# EAGLE board OpenMV-Shield-DESKTOP-4DKEQLF (EAGLE 9.1.1)
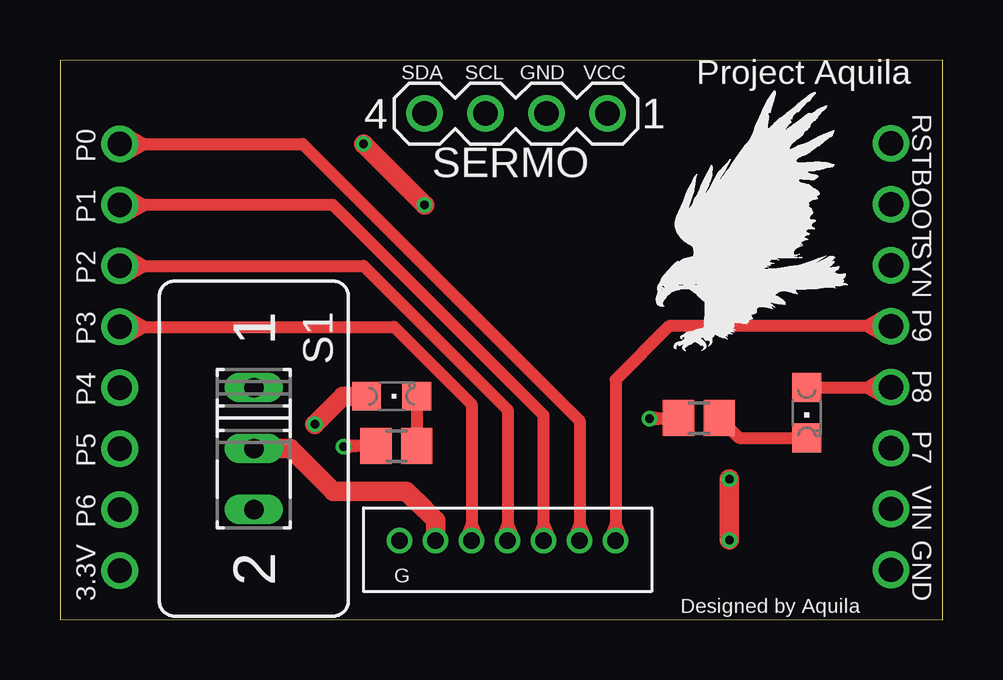
[diagram p0: board, top side]
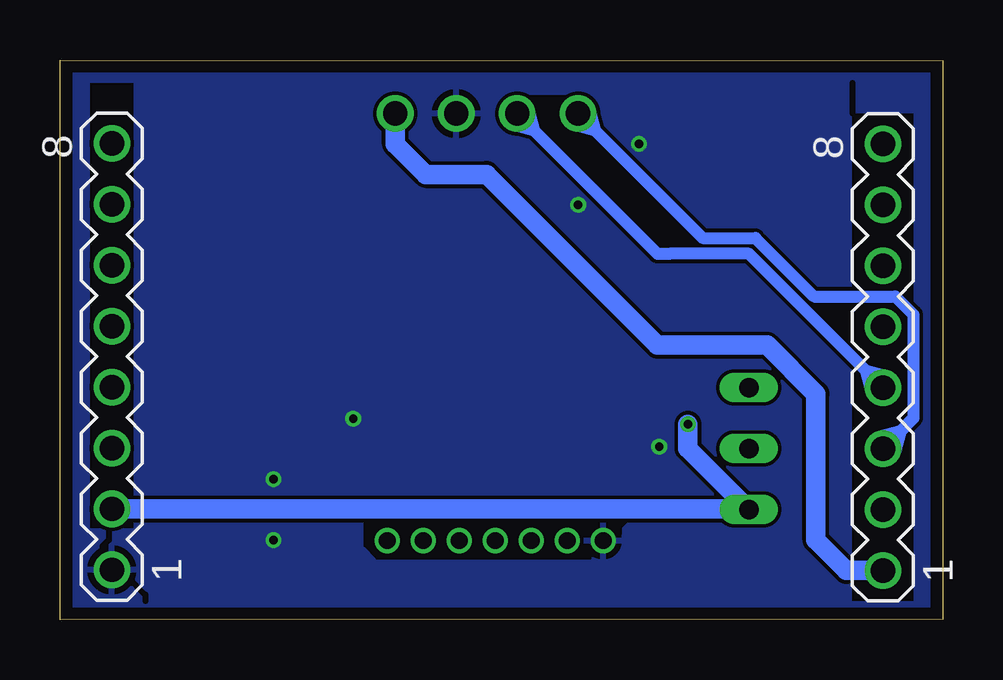
[diagram p1: board, bottom side, seen from below]

Size 36.78 x 23.34 mm. Coordinates in mm from the lower left corner, seen from the top.
Outline: 0,0.03 36.78,0 36.78,23.34 0,23.32 0,0.03
Copper layers (1*16): Top 0.035mm / dielectric 1.6mm / Bottom 0.035mm
Design rules "Elecrow_2-layer_PCB_eagle_rule": minimum track width 6mil, minimum drill 12mil, track to track 6mil, track to pad 6mil, pad to pad 6mil, via to via 8mil, smd to smd 0mil, copper to edge 20mil, drill to drill 10mil, minimum pad ring 6mil, minimum via ring 6mil, stop-mask expansion 0mil, vias tented up to drill 100mil, thermal gap 10mil
bRestrict: area 33.7,3.8 to 35.5,22.4; area 1.2,0.8 to 3.8,21.1; 11 lines

## Footprints (pad centres in the part's own frame; a part is rotated, then mirrored left to right if it is on the bottom)
CHIPLED_0805 = smd 1.2 x 1.2: A 0,-1.05; C 0,1.05
R0805 = smd 1.3 x 1.5: 1 -0.85,0; 2 0.85,0
B7B-ZR = drill 0.7: 1 10.5,-1.3; 2 9,-1.3; 3 7.5,-1.3; 4 6,-1.3; 5 4.5,-1.3; 6 3,-1.3; 7 1.5,-1.3
M251 = drill 0.813 long: 1 -2.54,0; 2 0,0; 3 2.54,0
MA04-1 = drill 1.016: 1 -3.81,0; 2 -1.27,0; 3 1.27,0; 4 3.81,0
MA08-1 = drill 1.016: 1 -8.89,0; 2 -6.35,0; 3 -3.81,0; 4 -1.27,0; 5 1.27,0; 6 3.81,0; 7 6.35,0; 8 8.89,0

## Placement (x,y rotation side)
L1  SP-L  [CHIPLED_0805]  13.82,9.32 270 top
L2  LED  [CHIPLED_0805]  31.12,8.64 180 top
LED-R  330  [R0805]  26.62,8.41 0 top
MV1  B7B-ZR  [B7B-ZR]  12.65,4.6 0 top
S1  [M251]  8.08,7.14 270 top
SERMO  [MA04-1]  19,21.11 180 top
SP-R  330  [R0805]  14.02,7.24 0 top
SV1  [MA08-1]  34.62,10.97 90 bottom
SV2  [MA08-1]  2.49,10.95 90 bottom
U$1  [EAGLE-PLC-8MM]  24.84,11.2 0 top

## Library data of the parts
L1 L2 = led
LED-R SP-R = 0@Mylibrary-main1
MV1 = jst
S1 = switch
SERMO SV1 SV2 = 0con-lstb; OC_FARNELL: unknown; OC_NEWARK: unknown
U$1 = logo

## Nets
+3V3: SERMO.1 SV2.1
+5V: L1.A S1.3 SV1.2
BOOT: SV1.7
GND: LED-R.1 MV1.7 SERMO.2 SP-R.1 SV1.1
MISOD: MV1.3 SV2.7
MOSID: MV1.2 SV2.8
MV: MV1.1 SV1.5
MVS: MV1.5 SV2.5
N$1: MV1.6 S1.2
N$2: L2.C LED-R.2
N$43: L1.C SP-R.2
P4: SERMO.3 SV2.4
P5: SERMO.4 SV2.3
P6: SV2.2
P7: SV1.3
P8: L2.A SV1.4
RST: SV1.8
SCKD: MV1.4 SV2.6
SYN: SV1.6

## Tracks (layer width: path | path; a pad name or v marks a point on that pad's centre or on a via)
+3V3
  Bottom 0.813: SERMO.1 22.81,19.84 21.54,18.57 19,18.57 11.89,11.46 7.32,11.46 5.28,9.42 5.28,3.33 4.01,2.06 SV2.1
+5V  (via drill 0.35)
  Top 0.813: L1.A 11.79,9.32 v10.62,8.15
  Bottom 0.813: 8.1,4.62 S1.3 | SV1.2 8.1,4.62 | v10.62,8.15 10.62,7.14 8.1,4.62
GND  (via drill 0.35)
  Top 0.508: LED-R.1 arc-90 25.74,8.38 25.09,8.38 | 25.09,8.38 v24.56,8.38 | SP-R.1 12.34,7.24 | 12.34,7.24 12.09,7.24 v11.81,7.21 | 25.09,8.38 24.57,8.45 v24.56,8.38 | 25.09,8.38 24.57,8.31 v24.56,8.38 | 12.34,7.24 11.82,7.29 v11.81,7.21 | 12.34,7.24 11.83,7.14 v11.81,7.21
  Top 0.813: v27.89,3.33 v27.89,5.87 | v12.65,19.84 v15.19,17.3
  pour Bottom: -0.05,24.92 36.78,24.92 36.78,-0.48 -0.05,-0.48
MISOD
  Top 0.508: MV1.3 20.15,4 | 20.15,4 20.15,8.53 11.38,17.3 3.51,17.3 | 3.51,17.3 SV2.7 | 20.15,4 19.9,3.4 MV1.3 | 20.15,4 20.4,3.4 MV1.3 | 3.51,17.3 2.74,17.74 SV2.7 | 3.51,17.3 2.74,16.86 SV2.7
MOSID
  Top 0.508: SV2.8 3.51,19.84 | 3.51,19.84 10.11,19.84 21.65,8.3 21.65,4 | 21.65,4 MV1.2 | 21.65,4 21.4,3.4 MV1.2 | 21.65,4 21.9,3.4 MV1.2 | 3.51,19.84 2.74,20.28 SV2.8 | 3.51,19.84 2.74,19.4 SV2.8
MV
  Top 0.508: 23.15,4 23.15,10.02 25.37,12.24 33.6,12.24 | 23.15,4 MV1.1 | SV1.5 33.6,12.24 | 23.15,4 22.9,3.4 MV1.1 | 23.15,4 23.4,3.4 MV1.1 | 33.6,12.24 34.37,11.8 SV1.5 | 33.6,12.24 34.37,12.68 SV1.5
MVS
  Top 0.508: SV2.5 3.51,12.22 | 3.51,12.22 13.92,12.22 17.15,8.99 17.15,4 | 17.15,4 MV1.5 | 3.51,12.22 2.74,12.66 SV2.5 | 3.51,12.22 2.74,11.78 SV2.5 | 17.15,4 16.9,3.4 MV1.5 | 17.15,4 17.4,3.4 MV1.5
N$1
  Top 0.813: MV1.6 15.65,4.14 15.19,4.6 14.43,5.36 11.38,5.36 9.6,7.14 S1.2
N$2
  Top 0.508: LED-R.2 28.29,7.59 L2.C
N$43
  Top 0.508: L1.C SP-R.2
P4
  Bottom 0.508: SERMO.3 17.01,20.39 | 17.01,20.39 11.89,15.27 11.38,15.27 8.08,15.27 3.21,10.4 | SV2.4 3.21,10.4 | 3.21,10.4 2.36,10.17 SV2.4 | 3.21,10.4 2.98,9.55 SV2.4 | 17.01,20.39 17.86,20.62 SERMO.3 | 17.01,20.39 17.24,21.24 SERMO.3
P5
  Bottom 0.508: SERMO.4 14.47,20.39 | 14.47,20.39 10.01,15.93 7.8,15.93 5.37,13.49 1.98,13.49 1.22,12.73 1.22,8.41 1.77,7.86 | SV2.3 1.77,7.86 | 1.77,7.86 2,7.01 SV2.3 | 1.77,7.86 2.62,7.63 SV2.3 | 14.47,20.39 15.32,20.62 SERMO.4 | 14.47,20.39 14.7,21.24 SERMO.4
P8
  Top 0.508: L2.A 33.6,9.69 | 33.6,9.69 34.6,9.69 | 33.6,9.69 34.37,9.26 SV1.4 34.36,10.14 33.6,9.69
  Top 0.61: 34.6,9.69 SV1.4
SCKD
  Top 0.508: 18.65,4 18.65,8.76 12.65,14.76 3.51,14.76 | 18.65,4 MV1.4 | SV2.6 3.51,14.76 | 18.65,4 18.4,3.4 MV1.4 | 18.65,4 18.9,3.4 MV1.4 | 3.51,14.76 2.74,15.2 SV2.6 | 3.51,14.76 2.74,14.32 SV2.6

## Text on the board
tPlace: Project Aquila
tNames: SDA | SCL | GND | VCC | RST | P0 | BOOT | P1 | SYN | P2 | P9 | P3 | P8 | P4 | P7 | P5 | VIN | P6 | GND | G | 3.3V | Designed by Aquila